# EAGLE board spring_reverb_8R_driver (EAGLE 7.1.0)
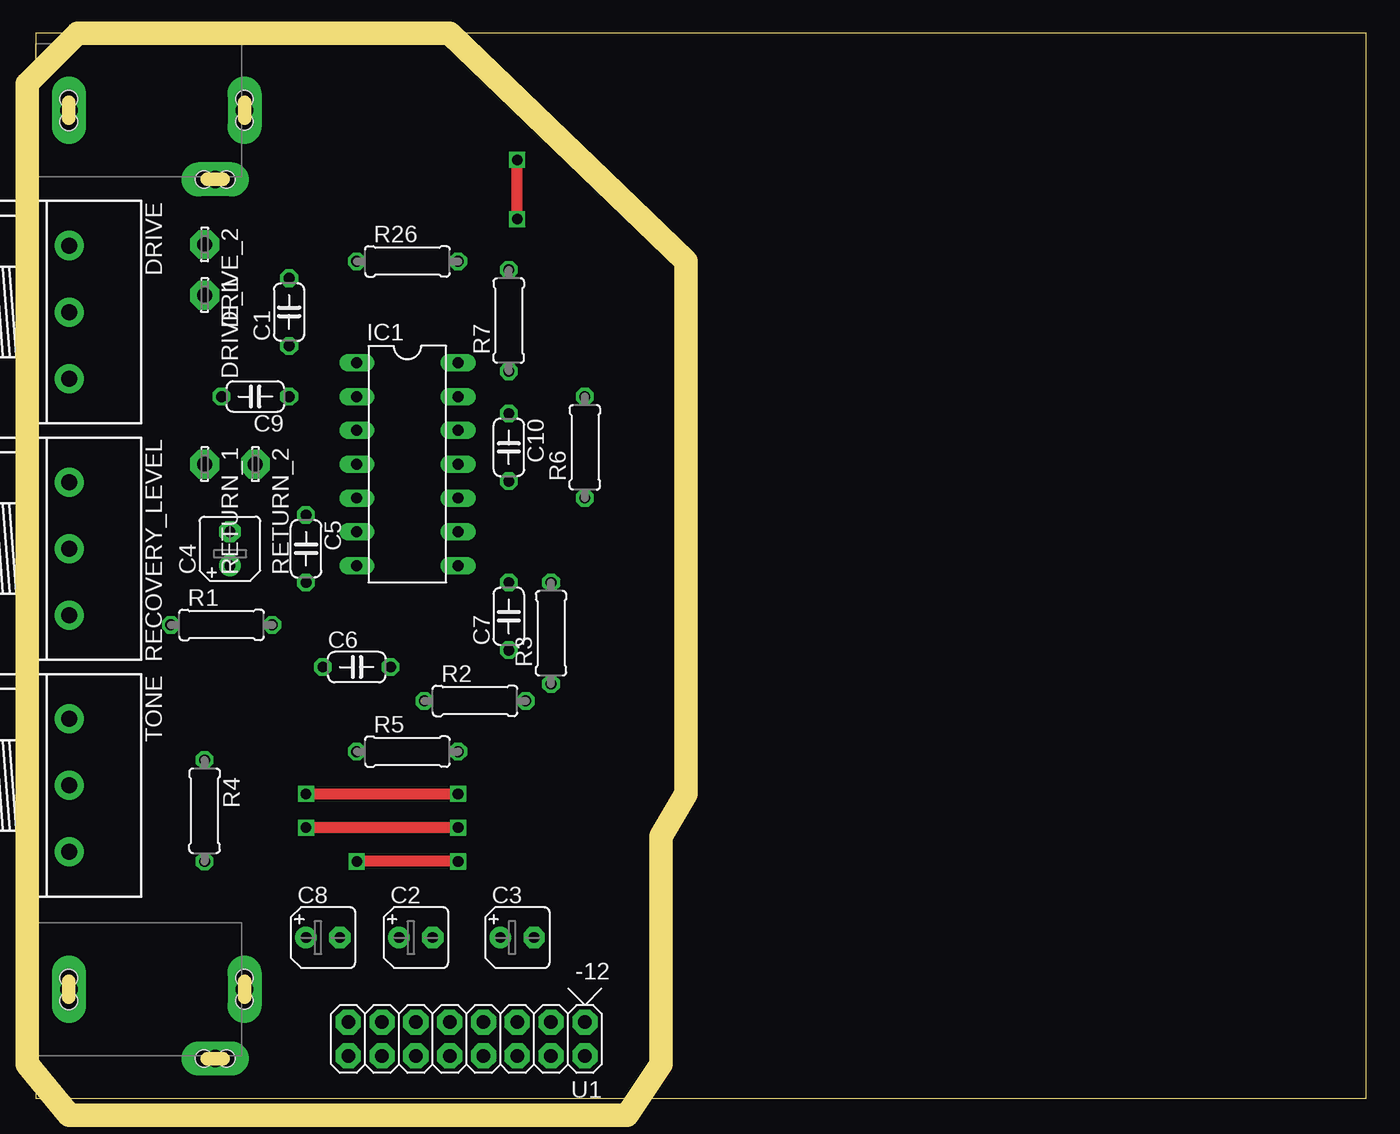
[diagram p0: board, top side]
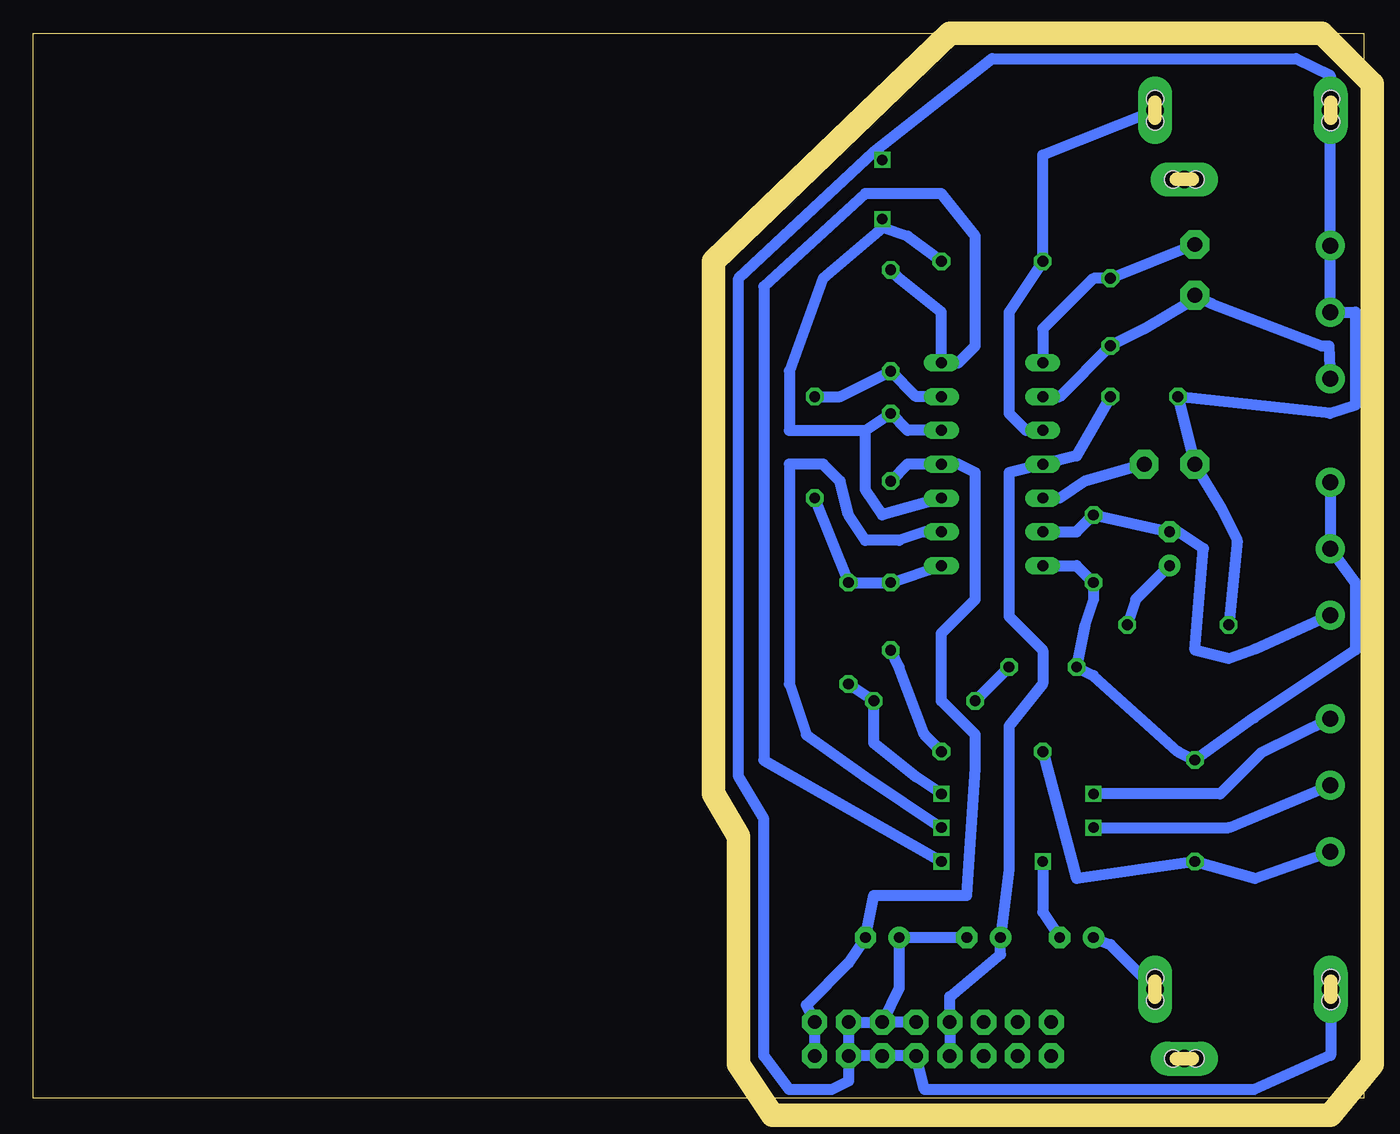
[diagram p1: board, bottom side, seen from below]

Size 100 x 80 mm. Coordinates in mm from the lower left corner, seen from the top.
Outline: 0,0 100,0 100,80 0,80 0,0
Copper layers (1*16): Top 0.035mm / dielectric 1.5mm / Bottom 0.035mm
Design rules "default *": minimum track width 24mil, minimum drill 24mil, track to track 16mil, track to pad 16mil, pad to pad 16mil, via to via 16mil, smd to smd 8mil, copper to edge 0mil, drill to drill 8mil, minimum pad ring 10mil, minimum via ring 8mil, stop-mask expansion 4mil, vias tented up to drill 0mil, thermal gap 10mil
Milling: 10 lines

## Footprints (pad centres in the part's own frame; a part is rotated, then mirrored left to right if it is on the bottom)
ERTHENVAR-JACK-90DEG = drill 1.3 pad 2.54 long: P$1 5,-2.5; P$2 -0.2,-13.5; P$3 5,-15.7 | hole 1.3: 5.842,-2.489; 4.14,-2.489; -0.203,-12.649; -0.203,-14.351; 5.842,-15.697; 4.166,-15.697
C050-024X044 = drill 0.813 octagon: 1 -2.54,0; 2 2.54,0
B45181A = drill 0.813 pad 1.6: + -1.27,0 | drill 0.813 pad 1.6 octagon: - 1.27,0
3RP/1610N = drill 1.2 pad 2.184: 1 -5,0; 2 0,0; 3 5,0
LSP11 = drill 1.118 pad 2.159 octagon: MP 0,0
DIL14 = drill 0.813 long: 1 -7.62,-3.81; 2 -5.08,-3.81; 3 -2.54,-3.81; 4 0,-3.81; 5 2.54,-3.81; 6 5.08,-3.81; 7 7.62,-3.81; 8 7.62,3.81; 9 5.08,3.81; 10 2.54,3.81; 11 0,3.81; 12 -2.54,3.81; 13 -5.08,3.81; 14 -7.62,3.81
0207/7 = drill 0.813 octagon: 1 -3.81,0; 2 3.81,0
POWER_16 = drill 1.016 pad 1.88 octagon: 1 -6.35,-1.27; 2 -6.35,1.27; 3 -3.81,-1.27; 4 -3.81,1.27; 5 -1.27,-1.27; 6 -1.27,1.27; 7 1.27,-1.27; 8 1.27,1.27; 9 3.81,-1.27; 10 3.81,1.27; 11 6.35,-1.27; 12 6.35,1.27; 13 8.89,-1.27; 14 8.89,1.27; 15 11.43,-1.27; 16 11.43,1.27

## Placement (x,y rotation side)
AUDIO_IN  AUDIO-JACK  [ERTHENVAR-JACK-90DEG]  0,69.22 90 top
AUDIO_OUT  AUDIO-JACK  [ERTHENVAR-JACK-90DEG]  0,3.17 90 top
C1  0.01uF  [C050-024X044]  19.05,59.05 90 top
C2  10uF  [B45181A]  28.57,12.06 0 top
C3  10uF  [B45181A]  36.2,12.06 0 top
C4  10uF  [B45181A]  14.61,41.27 90 top
C5  1nF  [C050-024X044]  20.32,41.27 270 top
C6  0.022uF  [C050-024X044]  24.13,32.38 0 top
C7  0.022uF  [C050-024X044]  35.56,36.2 90 top
C8  10uF  [B45181A]  21.59,12.06 0 top
C9  0.01uF  [C050-024X044]  16.51,52.7 180 top
C10  0.01uF  [C050-024X044]  35.56,48.9 270 top
DRIVE  250R  [3RP/1610N]  2.54,59.05 270 top
DRIVE_1  LSP11  [LSP11]  12.7,60.33 270 top
DRIVE_2  LSP11  [LSP11]  12.7,64.14 270 top
IC1  TL074P  [DIL14]  27.94,47.62 270 top
R1  68  [0207/7]  13.97,35.56 0 top
R2  2k2  [0207/7]  33.02,29.84 0 top
R3  10k  [0207/7]  38.73,34.92 90 top
R4  10k  [0207/7]  12.7,21.59 270 top
R5  2k2  [0207/7]  27.94,26.04 0 top
R6  100k  [0207/7]  41.27,48.9 90 top
R7  100k  [0207/7]  35.56,58.42 90 top
R26  1M  [0207/7]  27.94,62.87 0 top
RECOVERY_LEVEL  100k  [3RP/1610N]  2.54,41.27 270 top
RETURN_1  LSP11  [LSP11]  12.7,47.62 270 top
RETURN_2  LSP11  [LSP11]  16.51,47.62 270 top
TONE  25k  [3RP/1610N]  2.54,23.5 270 top
U1  POWER  [POWER_16]  34.92,4.45 180 top

## Library data of the parts
AUDIO_IN AUDIO_OUT = erthenvar
C1-C10 R1-R7 R26 = rcl
DRIVE RECOVERY_LEVEL TONE = pot
DRIVE_1 DRIVE_2 RETURN_1 RETURN_2 = solpad
IC1 = linear
U1 = eurorack

## Nets
+12V: C2.+ C9.1 IC1.4 U1.9 U1.10
-12V: C3.- C10.2 IC1.11 U1.1 U1.2
GND: AUDIO_IN.P$1 AUDIO_OUT.P$1 C2.- C3.+ C9.2 C10.1 DRIVE.1 DRIVE.2 IC1.10 IC1.12 R1.1 R26.2 RETURN_1.MP U1.3 U1.4 U1.5 U1.6 U1.7 U1.8
N$1: C1.2 DRIVE_2.MP IC1.1
N$2: C1.1 DRIVE.3 DRIVE_1.MP IC1.2
N$3: C4.+ R1.2
N$4: C4.- C5.1 IC1.6 RECOVERY_LEVEL.3
N$5: IC1.5 RETURN_2.MP
N$6: C5.2 C6.1 IC1.7 R4.1 RECOVERY_LEVEL.1 RECOVERY_LEVEL.2
N$7: C6.2 R2.1
N$8: C7.1 R5.2
N$9: R2.2 R3.1 TONE.1
N$10: R4.2 R5.1 TONE.3
N$11: C7.2 IC1.8 R3.2 R6.1
N$12: IC1.9 TONE.2
N$13: AUDIO_OUT.P$3 C8.+
N$14: C8.- IC1.14 R7.2
N$15: IC1.13 R6.2 R7.1
N$22: AUDIO_IN.P$3 IC1.3 R26.1

## Tracks (layer width: path | path; a pad name or v marks a point on that pad's centre or on a via)
+12V
  Bottom 0.813: U1.10 U1.9 31.11,7.62 27.3,10.79 C2.+ 26.67,17.14 26.67,27.94 24.13,31.11 24.13,33.66 26.67,36.2 26.67,46.99 IC1.4 21.59,48.26 C9.1
-12V
  Bottom 0.813: U1.2 U1.1 41.91,6.99 38.73,10.16 C3.- 36.83,15.24 29.84,15.24 29.21,24.77 29.21,27.3 31.75,29.84 31.75,34.92 29.21,37.47 29.21,46.99 30.48,47.62 IC1.11 34.29,47.62 C10.2
GND  (via drill 0.8)
  Top 0.813: v36.2,66.04 v36.2,70.48
  Bottom 0.813: U1.5 34.92,8.26 C3.+ C2.- | U1.4 U1.3 U1.5 | U1.4 U1.6 U1.8 33.02,0.64 8.26,0.64 2.5,3.21 AUDIO_OUT.P$1 | U1.7 U1.5 | IC1.12 34.29,50.16 C10.1 37.47,50.16 | R26.2 34.29,64.77 36.2,65.41 | 36.2,65.41 40.64,61.59 43.18,54.61 43.18,50.16 37.47,50.16 | IC1.10 36.2,43.81 37.47,45.72 37.47,50.16 | 2.54,76.08 DRIVE.1 DRIVE.2 0.64,59.05 0.64,52.07 2.54,51.44 C9.2 RETURN_1.MP 10.79,44.45 9.53,41.91 R1.1 | 2.54,76.08 AUDIO_IN.P$1 | U1.4 38.73,1.27 40.01,0.64 43.18,0.64 45.09,3.17 45.09,20.95 46.99,24.13 46.99,61.59 36.83,71.08 | 36.83,71.08 27.94,78.11 5.08,78.11 2.54,76.83 2.54,76.08 | 36.2,65.41 v36.2,66.04 | v36.2,70.48 36.23,70.48 36.83,71.08
N$1
  Bottom 0.813: IC1.1 24.13,57.78 20.32,61.59 C1.2 DRIVE_2.MP
N$2
  Bottom 0.813: IC1.2 22.86,52.7 C1.1 16.51,57.78 13.34,59.69 DRIVE_1.MP 11.43,59.69 3.17,56.52 2.62,56.52 DRIVE.3
N$3
  Bottom 0.813: C4.+ 17.14,37.47 R1.2
N$4
  Bottom 0.813: IC1.6 21.59,42.55 C5.1 C4.- 13.97,42.55 12.06,41.27 12.7,33.66 10.16,33.02 8.18,33.73 RECOVERY_LEVEL.3
N$5
  Bottom 0.813: RETURN_2.MP 20.95,46.35 22.86,45.09 IC1.5
N$6
  Bottom 0.813: IC1.7 21.59,40.01 C5.2 20.32,37.47 20.95,35.56 C6.1 20.32,31.75 13.97,26.04 R4.1 8.26,28.57 0.64,33.66 0.64,38.73 RECOVERY_LEVEL.2 RECOVERY_LEVEL.1
N$7
  Bottom 0.813: R2.1 C6.2
N$8
  Bottom 0.813: R5.2 33.02,27.3 34.92,32.38 C7.1
N$9  (via drill 0.8)
  Top 0.813: v20.32,22.86 v31.75,22.86
  Bottom 0.813: R3.1 R2.2 36.83,26.67 33.66,24.13 v31.75,22.86 | TONE.1 7.7,25.95 10.79,22.86 v20.32,22.86
N$10
  Bottom 0.813: R5.1 21.59,16.51 R4.2 8.18,16.51 TONE.3
N$11
  Bottom 0.813: R6.1 R3.2 C7.2 IC1.8
N$12  (via drill 0.8)
  Top 0.813: v31.75,20.32 v20.32,20.32
  Bottom 0.813: IC1.9 33.02,42.55 34.92,41.91 37.47,41.91 38.73,43.81 39.37,46.35 40.64,47.62 43.18,47.62 43.18,31.11 41.91,27.3 37.47,24.13 v31.75,20.32 | v20.32,20.32 10.16,20.32 TONE.2
N$13
  Bottom 0.813: C8.+ 19.05,11.53 AUDIO_OUT.P$3
N$14  (via drill 0.8)
  Top 0.813: v31.75,17.78 v24.13,17.78
  Bottom 0.813: R7.2 34.92,61.59 31.75,59.05 IC1.14 30.48,55.24 29.21,56.52 29.21,64.77 31.75,67.94 37.47,67.94 45.09,60.96 45.09,25.4 v31.75,17.78 | v24.13,17.78 24.13,13.97 C8.-
N$15
  Bottom 0.813: R6.2 39.37,52.7 R7.1 33.66,52.7 IC1.13
N$22
  Bottom 0.813: AUDIO_IN.P$3 24.13,70.86 R26.1 26.67,59.05 26.67,51.44 25.4,50.16 IC1.3